# EAGLE board powersupply (EAGLE 5.10)
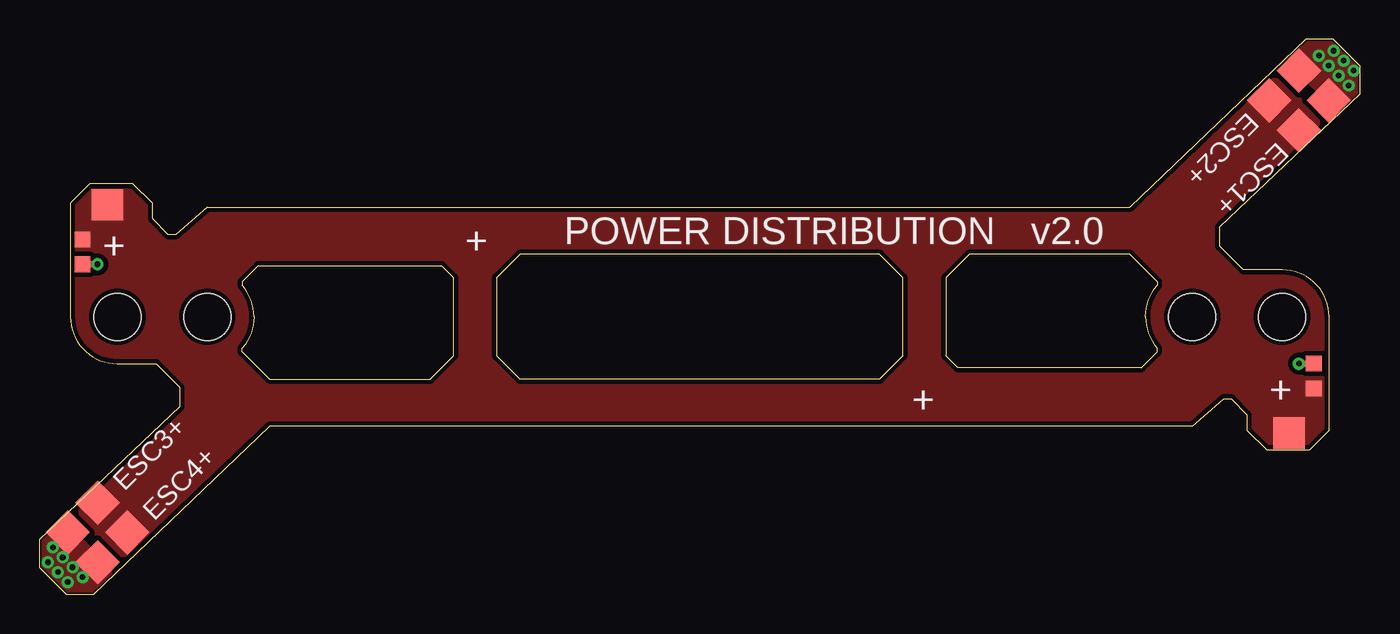
[diagram p0: board, top side]
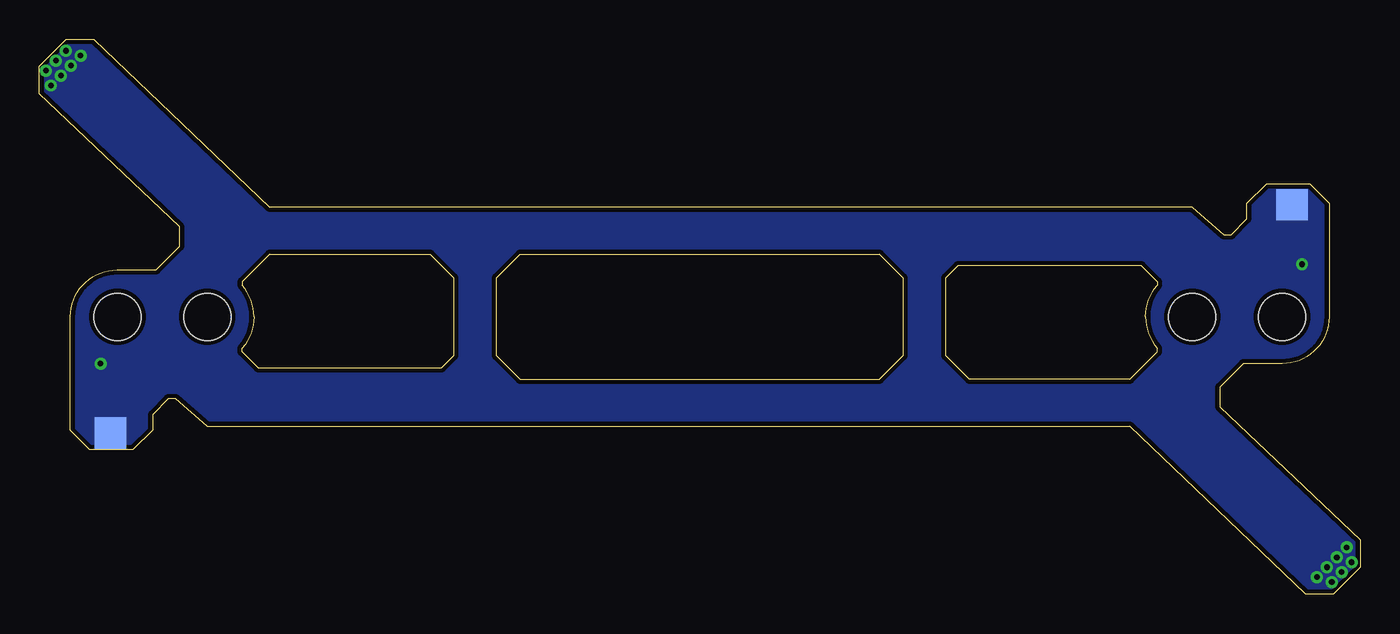
[diagram p1: board, bottom side, seen from below]

Size 84.5 x 35.5 mm. Coordinates in mm from the lower left corner, seen from the top.
Outline: 82.5,17.75 arc90 79.5,20.75
Outline: 82.5,17.75 arc90 79.5,20.75
Outline: 79.5,20.75 77,20.75 75.5,22.25 75.5,23.5 84.5,32 84.5,33.75 82.75,35.5 81,35.5 69.75,24.75 10.75,24.75 8.75,23 8.25,23 7.25,24 7.25,25 6,26.25 3.25,26.25 2,25 2,17.75 arc90 5,14.75 7.5,14.75 9,13.25 9,12 0,3.5 0,1.75 1.75,0 3.5,0 14.75,10.75 73.75,10.75 75.75,12.5 76.25,12.5 77.25,11.5 77.25,10.5 78.5,9.25 81.25,9.25 82.5,10.5 82.5,17.75
Outline: 13.75,17.75 arc41 13,19.75 13,20 14,21 25.75,21 26.5,20.25 26.5,15.25 25,13.75 14.75,13.75 13,15.5 13,15.75 arc41 13.75,17.75
Outline: 29.25,20.25 30.75,21.75 53.75,21.75 55.25,20.25 55.25,15.25 53.75,13.75 30.75,13.75 29.25,15.25 29.25,20.25
Outline: 70.5,14.5 58.75,14.5 58,15.25 58,20.25 59.5,21.75 69.75,21.75 71.5,20 71.5,19.75 arc41 70.75,17.75 arc41 71.5,15.75 71.5,15.5 70.5,14.5
Copper layers (1*16): Top 0.035mm / dielectric 1.5mm / Bottom 0.035mm
Design rules "default *": minimum track width 10mil, minimum drill 24mil, track to track 8mil, track to pad 8mil, pad to pad 8mil, via to via 8mil, smd to smd 8mil, copper to edge 5mil, drill to drill 8mil, minimum pad ring 10mil, minimum via ring 8mil, stop-mask expansion 4mil, vias tented up to drill 16mil, thermal gap 10mil
Holes 3 mm at 73.75,17.75 10.75,17.75 79.5,17.75 5,17.75 5,17.75 10.75,17.75 5,17.75 5,17.75 79.5,17.75 73.75,17.75 73.75,17.75 79.5,17.75 73.75,17.75 73.75,17.75 10.75,17.75 5,17.75 5,17.75 10.75,17.75 10.75,17.75 5,17.75 10.75,17.75 10.75,17.75 10.75,17.75 73.75,17.75 5,17.75 79.5,17.75 79.5,17.75 73.75,17.75 79.5,17.75 79.5,17.75 5,17.75 10.75,17.75 10.75,17.75 5,17.75 10.75,17.75 10.75,17.75 73.75,17.75 79.5,17.75 79.5,17.75 73.75,17.75 73.75,17.75 79.5,17.75 73.75,17.75 73.75,17.75 73.75,17.75 79.5,17.75 79.5,17.75 73.75,17.75 79.5,17.75 79.5,17.75 73.75,17.75 79.5,17.75 79.5,17.75 73.75,17.75 73.75,17.75 79.5,17.75 73.75,17.75 73.75,17.75 73.75,17.75 79.5,17.75 79.5,17.75 73.75,17.75 73.75,17.75 79.5,17.75 73.75,17.75 73.75,17.75

## Footprints (pad centres in the part's own frame; a part is rotated, then mirrored left to right if it is on the bottom)
TP20SQ = smd 2 x 2: TP 0,0
TP10SQ = smd 1 x 1: TP 0,0

## Placement (x,y rotation side)
BAT1+  TPSQTP20SQ  [TP20SQ]  4.37,24.91 0 top
BAT1-  TPSQTP20SQ  [TP20SQ]  4.37,24.91 0 bottom
BAT2+  TPSQTP20SQ  [TP20SQ]  79.94,10.31 0 top
BAT2-  TPSQTP20SQ  [TP20SQ]  79.94,10.31 0 bottom
BRD1+  TPSQTP10SQ  [TP10SQ]  2.78,22.69 0 top
BRD1-  TPSQTP10SQ  [TP10SQ]  2.78,21.11 0 top
BRD2+  TPSQTP10SQ  [TP10SQ]  81.52,13.17 0 top
BRD2-  TPSQTP10SQ  [TP10SQ]  81.52,14.75 0 top
ESC1+  TPSQTP20SQ  [TP20SQ]  80.57,29.68 225 top
ESC1-  TPSQTP20SQ  [TP20SQ]  82.47,31.58 135 top
ESC2+  TPSQTP20SQ  [TP20SQ]  78.67,31.58 225 top
ESC2-  TPSQTP20SQ  [TP20SQ]  80.57,33.49 315 top
ESC3+  TPSQTP20SQ  [TP20SQ]  3.73,5.87 225 top
ESC3-  TPSQTP20SQ  [TP20SQ]  1.83,3.96 315 top
ESC4+  TPSQTP20SQ  [TP20SQ]  5.64,3.96 45 top
ESC4-  TPSQTP20SQ  [TP20SQ]  3.73,2.05 135 top

## Library data of the parts
BAT1+ BAT1- BAT2+ BAT2- BRD1+ BRD1- BRD2+ BRD2- ESC1+ ESC1- ESC2+ ESC2- ESC3+ ESC3- ESC4+ ESC4- = testpad

## Nets
GND: BAT1-.TP BAT2-.TP BRD1-.TP BRD2-.TP ESC1-.TP ESC2-.TP ESC3-.TP ESC4-.TP
VCC: BAT1+.TP BAT2+.TP BRD1+.TP BRD2+.TP ESC1+.TP ESC2+.TP ESC3+.TP ESC4+.TP

## Tracks (layer width: path | path; a pad name or v marks a point on that pad's centre or on a via)
GND  (via drill 0.36)
  Top 0.406: v3.73,21.11 BRD1-.TP | BRD2-.TP v80.57,14.75
  other vias: 0.88,3.01 1.51,2.37 2.15,1.74 2.78,1.1 1.83,0.79 1.2,1.42 0.56,2.05 83.75,32.53 83.11,33.17 82.47,33.8 81.84,34.44 82.79,34.76 83.43,34.12 84.06,33.49
  pour Bottom (isolate 0.305, no thermals): -0.07,43.33 91.37,43.33 91.37,-6.2 -1.98,-6.2 -1.98,43.33
  pour Top (no thermals): 0.24,1.74 1.83,0.15 3.42,0.15 4.69,1.42 1.51,4.59 1.2,4.59 0.24,3.64
  pour Top (no thermals): 84.38,33.8 82.79,35.39 81.21,35.39 79.94,34.12 83.11,30.95 83.43,30.95 84.38,31.9
VCC
  pour Top (isolate 0.305, no thermals): -0.07,43.33 91.37,43.33 91.37,-6.2 -1.98,-6.2 -1.98,43.33

## Text on the board
tNames: + | POWER DISTRIBUTION | v2.0 | + | + | +